# EAGLE board MainPSU (EAGLE 7.6.0)
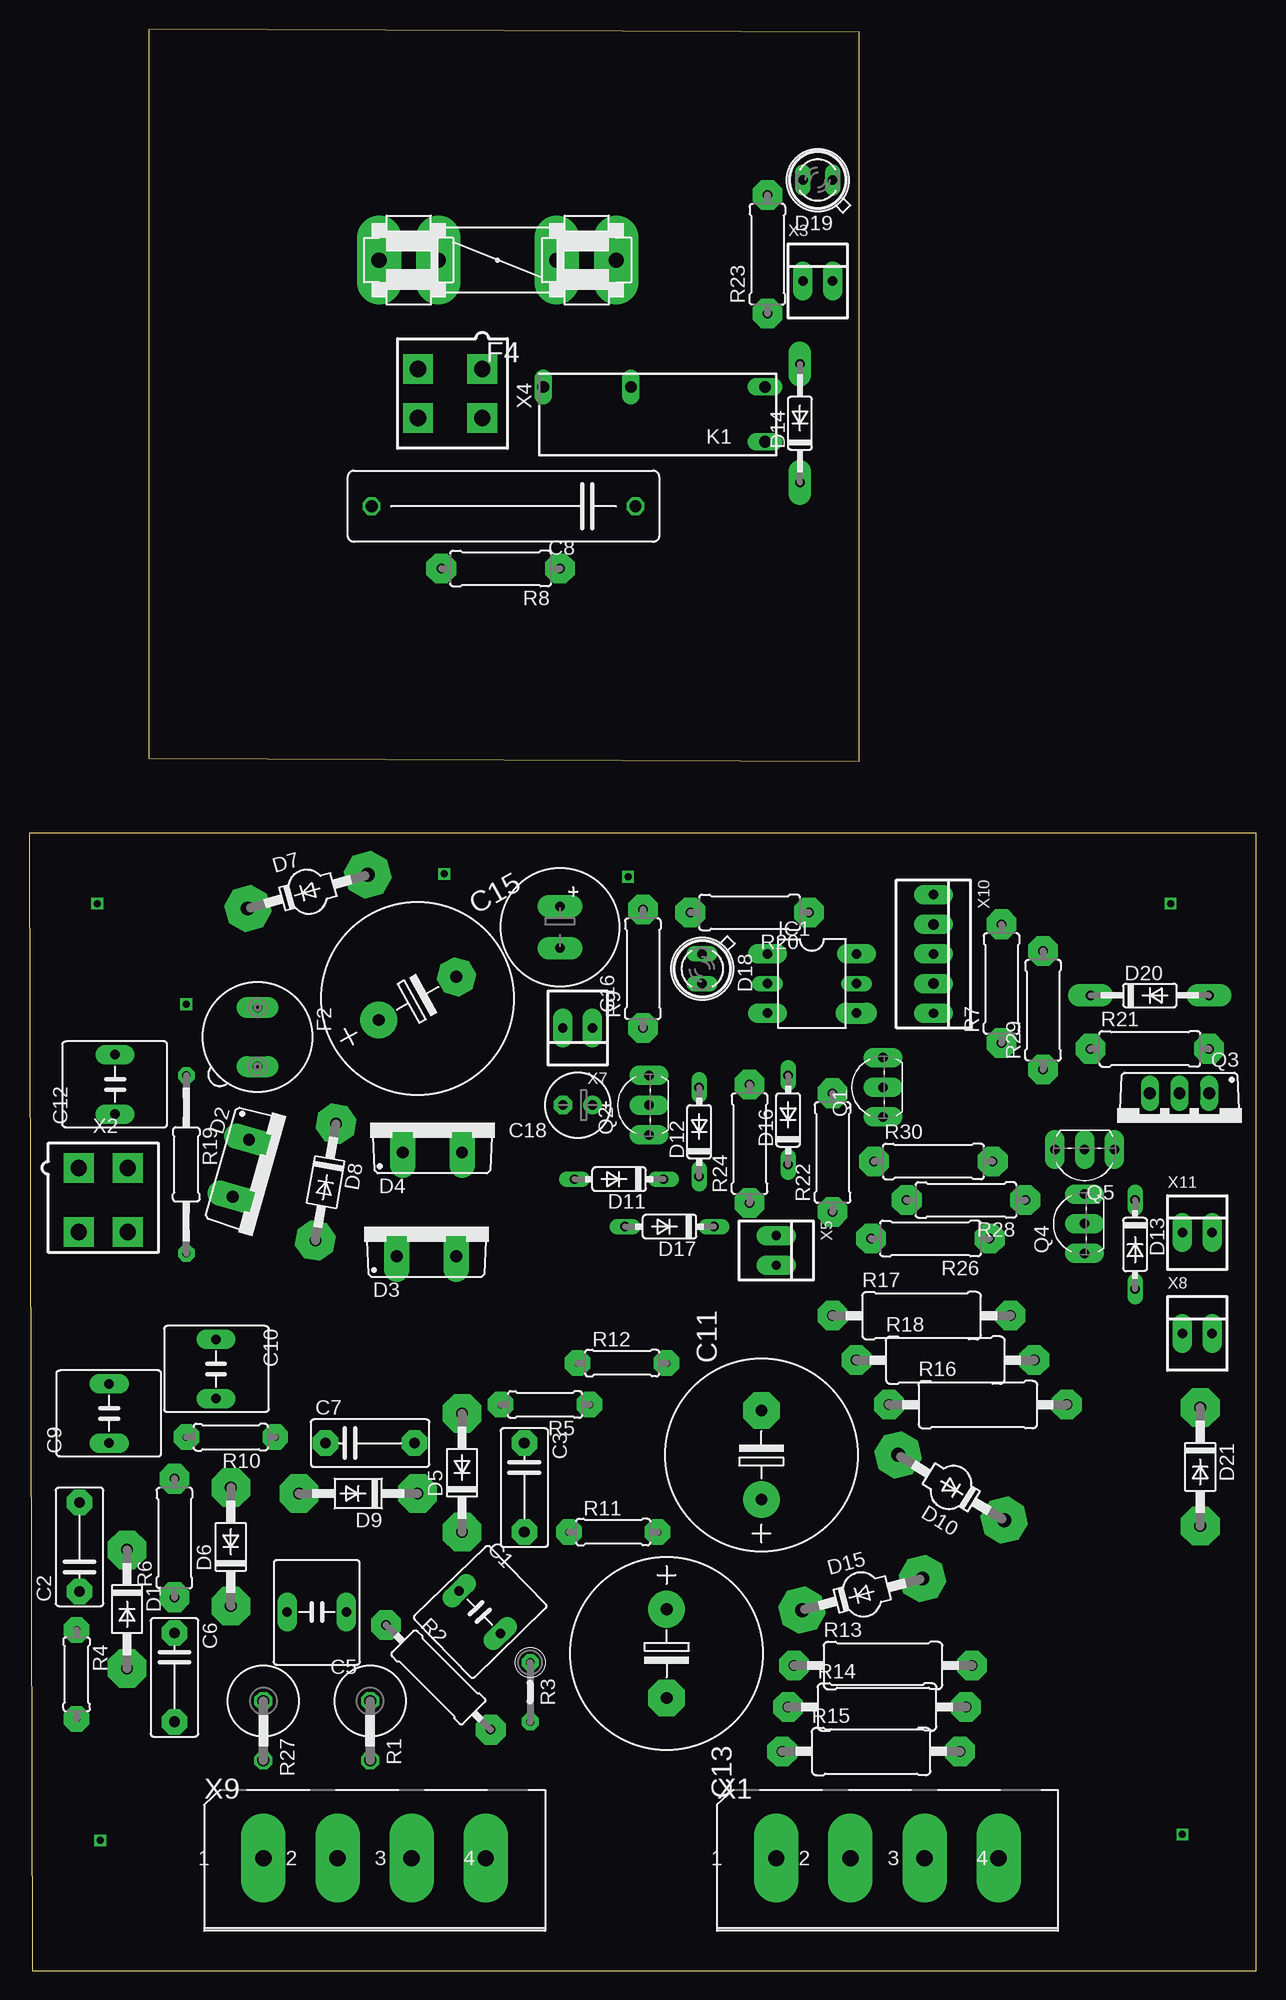
[diagram p0: board, top side]
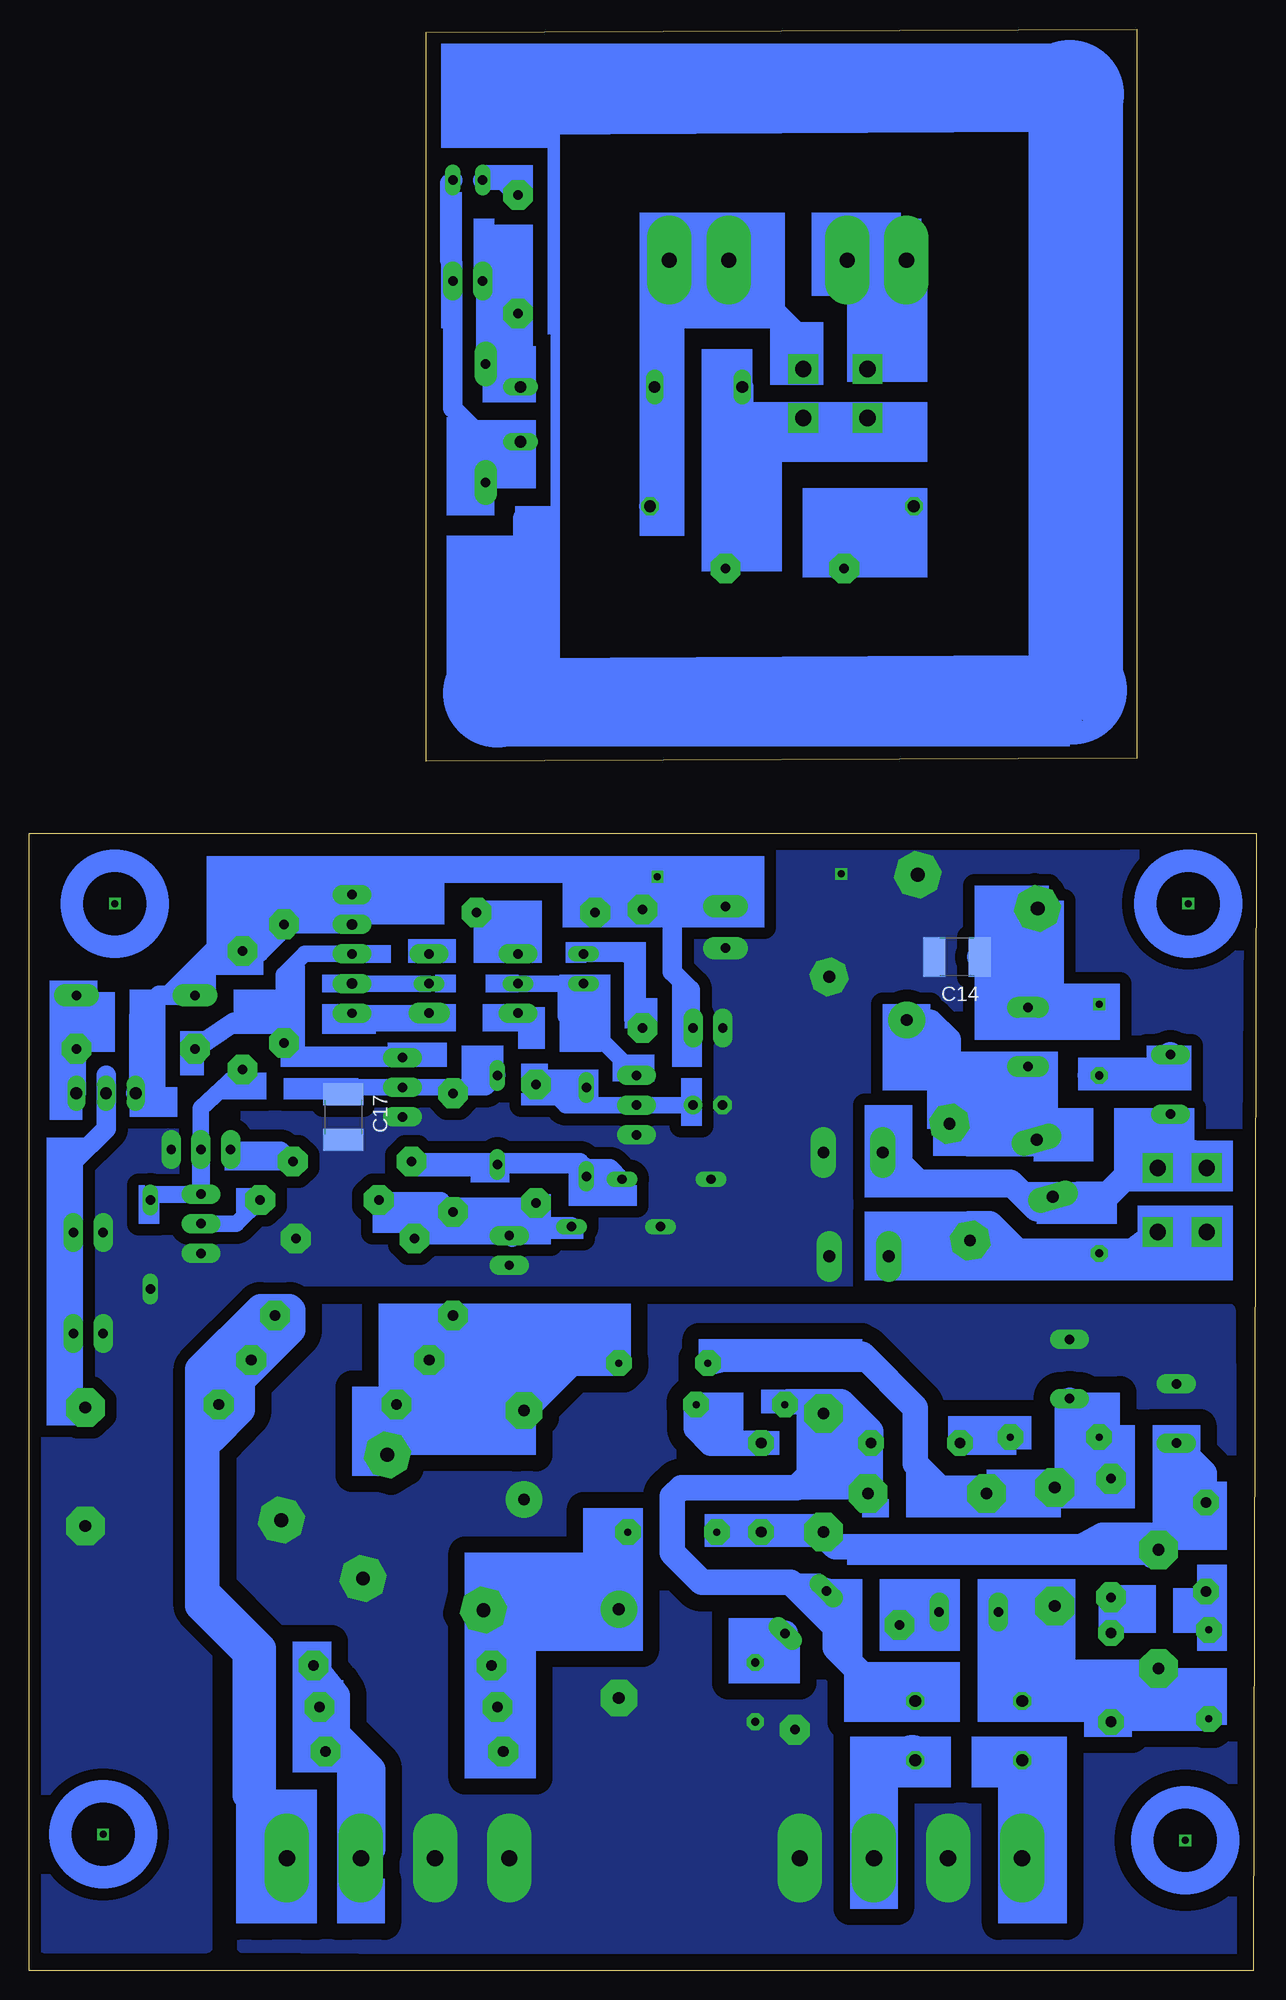
[diagram p1: board, bottom side, seen from below]

Size 105.14 x 166.35 mm. Coordinates in mm from the lower left corner, seen from the top.
Outline: 0.25,0 105.14,0 105.14,97.46 0,97.46 0.25,0
Outline: 10.24,166.35 10.24,103.89 71.12,103.63 71.12,166.1 10.24,166.35
Copper layers (1*16): Top 0.035mm / dielectric 1.5mm / Bottom 0.035mm
Design rules "default": minimum track width 10mil, minimum drill 24mil, track to track 8mil, track to pad 8mil, pad to pad 8mil, via to via 8mil, smd to smd 8mil, copper to edge 40mil, drill to drill 8mil, minimum pad ring 10mil, minimum via ring 8mil, stop-mask expansion 4mil, vias tented up to drill 0mil, thermal gap 10mil

## Footprints (pad centres in the part's own frame; a part is rotated, then mirrored left to right if it is on the bottom)
C050-075X075 = drill 0.813 pad 1.676 long: 1 -2.54,0; 2 2.54,0
C075-042X103 = drill 0.914 pad 2.184 octagon: 1 -3.81,0; 2 3.81,0
C225-062X268 = drill 1.016 octagon: 1 -11.303,0; 2 11.303,0
E7,5-16 = drill 1.016 pad 3.15: + -3.81,0 | drill 1.016 pad 3.15 octagon: - 3.81,0
C1812 = smd 1.9 x 3.4: 1 -1.95,0; 2 1.95,0
E3,5-10 = drill 0.813 pad 1.93 long: + -1.778,0; - 1.778,0
E2,5-6E = drill 0.813 pad 1.575: + -1.27,0 | drill 0.813 pad 1.575 octagon: - 1.27,0
DO41-10 = drill 1 pad 3.302 octagon: A 5.08,0; C -5.08,0
DO220S = drill 1.016 pad 2.184 long: A 2.54,-2.54; C -2.54,-2.54
SOD57-10 = drill 1.194 pad 3.81 octagon: A 5.334,0; C -5.334,0
DO35-7 = drill 0.813 long: A 3.81,0; C -3.81,0
DO35-10 = drill 0.813 pad 1.93 long: A 5.08,0; C -5.08,0
SFH482 = drill 0.813 long: A -1.27,0; K 1.27,0
19560 = drill 0.813 pad 1.778 long: 1 -2.54,0; 2 2.54,0
FUSE1 = drill 1.3 pad 3.81 long: 1A -10.16,0; 1B -5.08,0; 2A 10.16,0; 2B 5.08,0
DIL06 = drill 0.813 pad 1.676 long: 1 -2.54,-3.81; 3 2.54,-3.81; 6 -2.54,3.81 | drill 0.813 long: 2 0,-3.81; 5 0,3.81 | drill 0.813 pad 1.778 long: 4 2.54,3.81
LD = drill 1 long: 1 -9.2,2.35; 2 -9.2,-2.35; COM 2.3,-2.35; NO 9.8,-2.35
TO92-EBC = drill 0.813 pad 1.676 long: B 0,-1.27; C -2.54,-1.27; E 2.54,-1.27
TO220BV = drill 1.016 long: D 0,-2.54; G -2.54,-2.54; S 2.54,-2.54
0617V = drill 1.016 octagon: 1 -2.54,0; 2 2.54,0
0309/12 = drill 0.813 pad 2.54 octagon: 1 -6.35,0; 2 6.35,0
0207/5V = drill 0.7 pad 1.422 octagon: 1 -2.54,0; 2 2.54,0
0207/7 = drill 0.6 pad 2.184 octagon: 1 -3.81,0; 2 3.81,0
0309/10 = drill 0.813 pad 2.54 octagon: 1 -5.08,0; 2 5.08,0
0411/15 = drill 0.914 pad 2.54 octagon: 1 -7.62,0; 2 7.62,0
0207/15 = drill 0.7 pad 1.422 octagon: 1 -7.62,0; 2 7.62,0
GMSTBA4 = drill 1.397 pad 3.81 long: 1 -8.89,5.08; 2 -2.54,5.08; 3 3.81,5.08; 4 10.16,5.08
5566-4 = drill 1.4 pad 2.54 square: 1 2.1,-2.75; 2 -2.1,-2.75; 3 2.1,2.75; 4 -2.1,2.75
22-23-2021 = drill 0.8 pad 1.676 long: 1 -1.27,0; 2 1.27,0
22-23-2051 = drill 0.8 pad 1.676 long: 1 -5.08,0; 3 0,0; 5 5.08,0 | drill 0.9 pad 1.676 long: 2 -2.54,0; 4 2.54,0

## Placement (x,y rotation side)
C1  47nF  [C050-075X075]  38.61,30.73 314.1 top
C2  1nF  [C075-042X103]  4.32,36.32 90 top
C3  1nF  [C075-042X103]  42.42,41.4 270 top
C5  47nF  [C050-075X075]  24.64,30.73 180 top
C6  1nF  [C075-042X103]  12.45,25.15 270 top
C7  1nF  [C075-042X103]  29.21,45.21 0 top
C8  47nF X2  [C225-062X268]  40.64,125.48 180 top
C9  33nF  [C050-075X075]  6.86,47.75 90 top
C10  33nF  [C050-075X075]  16,51.56 270 top
C11  1800uF  [E7,5-16]  62.74,44.2 90 top
C12  100nF  [C050-075X075]  7.37,75.95 90 top
C13  1800uF  [E7,5-16]  54.61,27.18 270 top
C14  .1  [C1812]  25.65,86.87 180 bottom
C15  3300uF  [E7,5-16]  33.27,83.31 29.1 top
C16  100uF  [E3,5-10]  45.47,89.41 270 top
C17  1uF  [C1812]  78.23,73.15 270 bottom
C18  10uF  [E2,5-6E]  46.99,74.17 180 top
D1  MUR120  [DO41-10]  8.38,30.99 270 top
D2  3A  [DO220S]  20.57,68.07 254.1 top
D3  3A  [DO220S]  34.04,63.75 0 top
D4  3A  [DO220S]  34.54,72.64 0 top
D5  MUR120  [DO41-10]  37.08,42.67 90 top
D6  MUR120  [DO41-10]  17.27,36.32 90 top
D7  TVS20V  [SOD57-10]  23.88,92.46 15.7 top
D8  3A  [DO41-10]  25.4,67.56 260 top
D9  MUR120  [DO41-10]  28.19,40.89 180 top
D10  TVS36V  [SOD57-10]  78.99,41.4 148.4 top
D11  9v1  [DO35-7]  50.55,67.82 180 top
D12  4148  [DO35-7]  57.4,71.88 90 top
D13  9v1  [DO35-7]  94.74,62.23 270 top
D14  4007  [DO35-10]  66.04,132.59 90 top
D15  TVS36V  [SOD57-10]  71.37,32.26 14.7 top
D16  4148  [DO35-7]  65.02,72.9 90 top
D17  9v1  [DO35-7]  54.86,63.75 180 top
D18  LED  [SFH482]  57.66,85.85 270 top
D19  LED  [SFH482]  67.56,153.42 180 top
D20  9v1  [DO35-10]  96.01,83.57 0 top
D21  4007  [DO41-10]  100.33,43.18 270 top
F2  1A  [19560]  19.56,80.01 270 top
F4  250mA  [FUSE1]  40.13,146.56 180 top
IC1  4N28  [DIL06]  67.06,84.58 270 top
K1  G5NB  [LD]  53.85,133.35 180 top
Q1  ZVN2106  [TO92-EBC]  71.88,75.69 90 top
Q2  ZVN2106  [TO92-EBC]  51.82,74.17 90 top
Q3  PMOS  [TO220BV]  98.55,72.64 180 top
Q4  ZVN2106  [TO92-EBC]  89.15,64.01 90 top
Q5  ZVN2106  [TO92-EBC]  90.42,69.09 180 top
R1  2.2  [0617V]  29.21,20.57 270 top
R2  100  [0309/12]  35.05,25.15 315 top
R3  100  [0207/5V]  42.93,23.88 270 top
R4  1k  [0207/7]  4.06,25.4 270 top
R5  1k  [0207/7]  44.2,48.51 180 top
R6  1k  [0309/10]  12.45,37.08 90 top
R7  2k2  [0309/10]  83.31,84.58 90 top
R8  5.1  [0309/10]  40.39,120.14 180 top
R9  1k74  [0309/10]  52.58,85.85 90 top
R10  1k  [0207/7]  17.27,45.72 180 top
R11  .5A PTC  [0207/7]  50.04,37.59 0 top
R12  .5A PTC  [0207/7]  50.8,52.07 0 top
R13  68  [0411/15]  73.15,26.16 0 top
R14  68  [0411/15]  72.64,22.61 0 top
R15  68  [0411/15]  72.14,18.8 0 top
R16  68  [0411/15]  81.28,48.51 0 top
R17  68  [0411/15]  76.45,56.13 0 top
R18  68  [0411/15]  78.49,52.32 0 top
R19  220  [0207/15]  13.46,69.09 270 top
R20  330  [0309/10]  61.72,90.68 180 top
R21  4k7  [0309/10]  96.01,78.99 0 top
R22  1M  [0309/10]  68.83,70.1 90 top
R23  2k2  [0309/10]  63.25,147.07 90 top
R24  1M  [0309/10]  61.72,70.87 90 top
R26  4k7  [0309/10]  77.22,62.74 180 top
R27  2.2  [0617V]  20.07,20.57 270 top
R28  1k  [0309/10]  80.26,66.04 180 top
R29  4k7  [0309/10]  86.87,82.3 90 top
R30  220  [0309/10]  77.47,69.34 0 top
X1  DC  [GMSTBA4]  72.9,4.57 0 top
X2  9VAC  [5566-4]  6.35,66.04 180 top
X3  RELAY  [22-23-2021]  67.56,144.78 0 top
X4  LINE  [5566-4]  36.07,135.13 90 top
X5  PG  [22-23-2021]  64.01,61.72 270 top
X7  5V  [22-23-2021]  46.99,80.77 180 top
X8  5V-AUX  [22-23-2021]  100.08,54.61 0 top
X9  AC  [GMSTBA4]  28.96,4.57 0 top
X10  [22-23-2051]  77.47,87.12 270 top
X11  5V-AUX  [22-23-2021]  100.08,63.25 0 top

## Library data of the parts
C1-C3 C5-C18 R1-R24 R26-R30 = resistor
D1-D17 D20 D21 = diode
D18 D19 = led
F2 = fuse; MPN: 56000001009; OC_FARNELL: 1185363; OC_NEWARK: 15P8392
F4 = special
IC1 = ic-package
K1 = relay; OC_FARNELL: unknown; OC_NEWARK: unknown
Q1 Q2 Q4 Q5 = transistor-npn
Q3 = transistor-power
X1 X9 = con-phoenix-762; MF: FARNELL; MPN: 1757268; OC_FARNELL: 3705195; OC_NEWARK: 71C4163
X2 X4 = con-molex; OC_FARNELL: unknown; OC_NEWARK: unknown
X3 X5 X7 X8 X11 = con-molex; MF: MOLEX; MPN: 22-23-2021; OC_FARNELL: 1462926; OC_NEWARK: 25C3832
X10 = con-molex; MF: MOLEX; MPN: 22-23-2051; OC_FARNELL: 1462952; OC_NEWARK: 38C9178

## Nets
DGND: C9.2 C10.1 C11.+ C13.- D10.C D15.A R2.2 R3.2 X1.1 X1.2 X9.2 X9.4
GND: C14.2 C15.- C16.- C17.2 C18.- D3.A D4.A D7.A D11.A D13.A D17.A D21.A Q1.C Q2.C Q4.C Q5.C R26.1 X5.2 X7.2 X8.1 X11.1
N$2: R13.2 R14.2 R15.2 X1.3
N$3: R16.2 R17.2 R18.2 X1.4
N$5: R1.2 X9.3
N$6: R27.2 X9.1
N$8: C8.2 R8.2
N$9: C5.1 R2.1
N$11: C1.2 R3.1
N$12: C13.+ D15.C R11.2 R13.1 R14.1 R15.1
N$13: C8.1 F4.1A K1.COM X4.1
N$14: C12.2 R19.1
N$15: D21.C Q3.D X8.2 X11.2
N$16: C1.1 C7.2 D5.A D9.C R1.1 R5.2
N$17: F4.2A X4.3
N$18: C2.1 R4.1
N$19: C2.2 C3.2 C9.1 D1.C D5.C R11.1
N$20: C5.2 C6.2 D1.A D6.C R4.2 R27.1
N$21: K1.NO R8.1 X4.2 X4.4
N$22: C3.1 R5.1
N$24: C11.- D10.A R12.2 R16.1 R17.1 R18.1
N$26: C6.1 R6.1
N$28: D3.C D8.A R19.2 X2.3 X2.4
N$29: C10.2 D6.A D9.A R6.2 R10.2 R12.1
N$30: C7.1 R10.1
N$33: C16.+ D20.C Q3.S R7.2 R9.2 R20.2 R29.2 X7.1 X10.1 X10.2
N$34: D18.K IC1.2 Q2.E
N$35: C12.1 D2.A D4.C X2.1 X2.2
N$36: D14.A K1.2 R23.1 X3.1
N$37: D20.A Q3.G R21.2
N$38: C18.+ D12.A Q2.B R24.2
N$39: C17.1 D16.A Q1.B R22.2
N$40: D17.C R22.1 R24.1 R26.2 R28.2 X5.1
N$41: Q4.B R28.1
N$42: D13.C Q4.E Q5.B R29.1
N$43: Q5.E R30.2
N$44: D11.C D12.C D16.C R30.1
N$45: D19.K R23.2
N$46: IC1.1 R20.1
N$48: C15.+ D2.C D8.C F2.2
N$49: C14.1 D7.C F2.1
N$51: D14.C D19.A K1.1 X3.2
N$52: IC1.4 X10.5
N$53: Q1.E R7.1 R21.1 X10.3
N$54: D18.A R9.1
N$55: IC1.5 X10.4

## Tracks (layer width: path | path; a pad name or v marks a point on that pad's centre or on a via)
DGND
  pour Bottom (isolate 1.422, no thermals): 86.87,2.03 87.63,56.64 2.29,56.64 2.03,1.27
GND  (via drill 0.6)
  other vias: 35.56,93.98
  pour Bottom (isolate 1.016, no thermals): 89.92,2.03 89.92,55.63 86.36,59.18 1.78,59.18 1.52,95.76 13.72,95.5 103.38,95.5 103.89,2.03
N$1  (via drill 0.6)
  other vias: 5.84,91.44
N$2
  Bottom 2.184: R13.2 78.74,23.62 | 78.74,23.62 78.74,19.05 79.5,19.05 R15.2 | 76.71,8.64 76.45,8.89 X1.3 75.69,10.41 75.69,17.27 80.26,21.84 R14.2 79.25,23.62 78.74,23.62
N$3
  Bottom 2.184: R17.2 86.99,53.21 | 86.99,53.21 89.92,50.29 89.92,49.53 | 83.06,12.7 83.82,13.46 83.82,13.72 85.09,14.99 | R16.2 89.92,49.53 | R18.2 86.99,53.21 | 85.85,28.45 86.11,28.19 | 89.92,49.53 89.92,32.51 85.09,27.69 85.09,14.99 | 90.68,45.97 90.68,45.47 89.41,45.47 86.87,48.01 86.87,50.55 82.55,54.86 82.55,56.64 82.8,56.9 85.34,56.9 90.68,51.56 90.68,31.24 87.12,27.69 | 86.11,28.19 85.85,27.94 85.85,15.75 85.09,14.99 | 86.11,28.19 86.36,27.94 | 86.36,27.94 87.38,27.94 | 87.12,27.69 86.61,27.18 86.61,14.99 83.06,11.43 83.06,8.89 82.8,9.14 X1.4 82.8,10.41 | 86.36,27.94 86.61,27.69 87.12,27.69
N$4  (via drill 0.6)
  other vias: 6.1,11.18
N$5
  Bottom 3.81: R1.2 29.46,18.29 32.51,17.78 32.77,18.03 X9.3
N$6
  Bottom 3.81: R27.2 X9.1 20.07,8.64
N$7
  Bottom 1.93: 62.74,124.46 62.74,111.51 18.54,111.76 18.54,158.5 62.74,158.24 62.48,158.5
N$8
  Bottom 1.93: C8.2 34.29,125.48 35.31,124.46 R8.2
N$9
  Bottom 2.184: R2.1 29.97,30.73 C5.1
N$10  (via drill 0.6)
  other vias: 97.79,91.44
N$11
  Bottom 2.184: R3.1 40.43,28.91 C1.2
N$12
  Bottom 2.184: R11.2 53.85,31.24 C13.+ 62.47,31.18 | D15.C 65.02,31.24 62.47,31.18 | R15.1 65.02,19.3 | 65.02,19.3 R14.1 | R14.1 66.04,23.62 R13.1 62.47,29.73 62.47,31.18 | 65.02,19.3 65.28,19.56 65.28,22.1 64.77,22.61 R14.1
N$13
  Bottom 1.93: X4.1 38.82,139.66 43.94,144.78 48.51,144.78 49.91,146.18 | 49.91,146.18 F4.1A | 49.91,146.18 51.55,144.54 K1.COM 51.55,125.59 C8.1
N$14
  Bottom 2.184: C12.2 8.13,77.22 8.64,76.71 R19.1 14.22,76.71
N$15
  Bottom 1.676: 98.55,76.71 Q3.D 98.55,72.14 101.35,69.34 X11.2 X8.2 101.35,49.02 D21.C
N$16
  Bottom 2.184: R1.1 30.48,24.38 32.77,24.38 36.07,27.69 36.07,29.46 37.97,31.37 | 37.97,31.37 39.88,33.27 47.5,33.27 50.04,35.81 50.04,40.64 49.28,41.4 39.37,41.4 37.85,42.93 37.08,42.93 | 37.08,43.69 D5.A 37.34,47.75 38.35,48.77 | 37.08,43.69 37.08,42.93 | R5.2 40.13,48.77 39.12,48.77 38.35,48.77 | D9.C 35.31,42.93 37.08,42.93 | 34.54,43.69 37.08,43.69 | C1.1 37.97,31.42 37.97,31.37 | C7.2 33.02,46.23 35.56,48.77 38.35,48.77
N$17
  Bottom 1.93: X4.3 32.51,138.03 32.51,146.81 32.26,146.56 F4.2A
N$18
  Bottom 2.184: R4.1 4.06,32.51 C2.1
N$19
  Bottom 1.93: C9.1 4.32,42.67 C2.2
  Bottom 2.184: C2.2 8.13,37.34 8.89,37.34 | 8.89,37.34 13.21,37.34 14.99,36.32 36.07,36.32 37.34,37.59 | 37.34,37.59 C3.2 R11.1 | D5.C 37.34,37.59 | D1.C 8.89,35.56 8.89,37.34
N$20
  Bottom 2.184: R4.2 4.83,23.11 8.38,23.11 | 8.38,23.11 12.7,23.11 | 12.7,23.11 17.27,23.11 | 17.27,23.11 R27.1 | D1.A 8.38,23.11 | C6.2 12.7,21.59 12.7,23.11 | D6.C 17.27,23.11 | C5.2 22.1,28.45 17.27,23.11
N$21
  Bottom 1.93: 42.67,133.03 X4.2 X4.4 | 42.67,133.03 43.62,133.03 44.05,133.46 K1.NO | R8.1 42.67,122.94 42.67,133.03
N$22
  Bottom 2.184: C3.1 46.74,45.21 48.01,46.48 R5.1
N$24
  Bottom 2.184: C11.- 58.67,52.07 | 58.67,52.07 R12.2 | 58.67,52.07 58.93,52.32 67.82,52.32 68.71,51.43 | 68.71,51.43 68.96,51.18 | 68.96,51.18 74.52,45.62 D10.A 74.71,47.46 R16.1 | R17.1 68.71,56.01 68.71,51.43 | R18.1 69.72,51.18 68.96,51.18
N$25  (via drill 0.6)
  other vias: 98.81,11.68
N$26
  Bottom 2.184: C6.1 R6.1
N$28
  Bottom 1.676: X2.3 X2.4
  Bottom 2.184: D8.A 25.08,61.21 30.73,61.21 32.26,62.74 32.26,63.5 32,63.25 D3.C | X2.4 11.54,60.96 12.95,60.96 | 12.95,60.96 21.08,60.96 20.83,61.21 20.07,61.21 22.86,64.01 24.64,64.01 23.62,62.99 D8.A | 23.11,62.99 D8.A | R19.2 12.95,60.96
N$29
  Bottom 1.93: C10.2 13.72,45.72 R10.2
  Bottom 2.184: R10.2 12.45,44.7 R6.2 12.7,42.42 D6.A 19.3,41.15 19.81,41.4 21.08,41.4 21.59,40.89 D9.A 26.67,40.89 29.21,43.43 29.21,48.26 33.78,52.83 43.94,52.83 R12.1
N$30
  Bottom 2.184: R10.1 21.34,45.97 24.64,45.97 C7.1
N$32  (via drill 0.6)
  other vias: 13.46,82.8
N$33
  Bottom 1.422: 83.57,90.93 83.31,90.93 | 83.31,90.93 83.06,90.93 | R7.2 83.31,90.93 | 83.06,90.93 77.47,90.93 X10.1 | R9.2 52.32,91.19 50.04,91.19 C16.+ | 83.57,90.93 83.57,88.9 85.34,87.12 87.12,87.12 87.12,88.65 84.84,90.93 83.57,90.93 | 83.06,90.93 84.71,89.28 85.85,88.14 86.36,88.14 R29.2
  Bottom 1.676: X7.1 48.51,81.03 48.51,84.07 50.04,85.6 50.04,91.19 | D20.C 93.22,83.57 | 93.22,83.57 87.5,89.28 84.71,89.28 | Q3.S 95.76,75.44 95.76,81.79 93.98,83.57 93.22,83.57 | X10.2 77.47,90.93 74.17,94.23 55.37,94.23 55.12,93.98 52.58,93.98 | R9.2 52.58,93.98 | 52.58,93.98 55.88,90.68 R20.2
N$34
  Bottom 1.422: Q2.E 56.13,79.76 57.15,79.76 59.18,81.79 59.18,84.58 D18.K IC1.2
N$35
  Bottom 0.406: C12.1 8.13,71.88 7.87,71.88
  Bottom 1.676: 7.87,69.34 8.38,69.85 8.38,70.1
  Bottom 2.184: D4.C 32.26,70.87 28.96,67.56 21.08,67.56 18.8,65.28 D2.A 15.24,66.55 12.7,66.55 9.14,70.1 8.38,70.1 5.33,70.1 5.01,69.53 X2.1 | 7.87,72.9 7.87,71.88 7.87,69.34 8.43,68.79 X2.2
N$36
  Bottom 1.676: K1.2 64.07,135.7 D14.A 66.04,139.19 | X3.1 66.04,144.53 66.04,139.19 | R23.1 66.04,139.19
N$37
  Bottom 1.676: D20.A 100.08,83.57 100.08,80.26 R21.2 Q3.G
N$38
  Bottom 1.422: 60.07,75.06 59.18,74.17 Q2.B C18.+ | 60.07,75.06 60.96,75.95 R24.2 | D12.A 57.66,75.44 59.69,75.44 60.07,75.06
N$39
  Bottom 1.422: D16.A 66.04,75.69 68.58,75.69 | 68.58,75.69 Q1.B 77.64,75.69 C17.1 | R22.2 68.58,75.44 68.58,75.69
N$40
  Bottom 1.422: R22.1 69.22,65.41 | 69.22,65.41 69.85,66.04 72.14,66.04 | 72.14,66.04 R28.2 | R26.2 72.14,66.04 | R24.1 61.98,65.53 63.75,65.53 | 63.75,65.53 68.58,65.53 68.71,65.41 69.22,65.41 | X5.1 63.75,62.74 63.75,64.52 63.75,65.53
  Bottom 1.676: D17.C 62.23,63.75 62.99,64.52 63.75,64.52
N$41
  Bottom 1.422: R28.1 87.38,64.01 Q4.B
N$42
  Bottom 1.422: D13.C 94.49,66.55 Q4.E Q5.B 90.42,73.91 R29.1
N$43
  Bottom 1.422: R30.2 83.57,70.36 Q5.E
N$44
  Bottom 1.422: D11.C 55.37,68.83 57.4,68.83 57.66,69.09 | 57.66,69.09 57.91,69.34 65.02,69.34 | 65.02,69.34 R30.1 | D16.C 65.02,69.34 | D12.C 57.66,68.33 57.66,69.09
N$45
  Bottom 1.676: R23.2 64.52,153.42 D19.K
N$46
  Bottom 1.676: R20.1 IC1.1
N$48
  Bottom 2.184: 16.26,70.87 24.7,70.87 D8.C 26.67,72.83 | 16.26,70.87 15.49,70.87 16,71.37 | 16.26,70.87 D2.C | C15.+ 27.94,81.28 26.42,79.76 26.42,75.44 22.35,71.37 D2.C | D2.C 16,71.37 | 16,71.37 15.24,71.37 | F2.2 19.3,77.22 19.3,72.14 | 19.3,72.14 19.3,71.88 | D2.C 18.54,72.14 19.3,72.14
N$49
  Bottom 2.184: F2.1 18.97,83.13 D7.C 21.95,86.87 C14.1
N$51
  Bottom 1.676: D14.C 63.05,130.5 K1.1 63.05,130.1 62.99,130.05 65.02,130.05 68.83,133.86 X3.2 68.83,146.3 69.09,146.56 69.09,153.16 D19.A
N$52
  Bottom 1.422: IC1.4 X10.5
N$53
  Bottom 1.422: Q1.E 73.41,78.49 82.55,78.49 83.31,79.25 R7.1 83.31,81.28 83.31,85.34 81.53,87.12 X10.3
  Bottom 1.676: R21.1 87.63,81.28 83.31,81.28
N$54
  Bottom 1.422: D18.A 53.85,87.12
  Bottom 1.676: R9.1 53.34,81.53 53.34,86.87 53.59,87.12 53.85,87.12
N$55
  Bottom 1.422: IC1.5 X10.4
N$56  (via drill 0.6)
  other vias: 51.31,93.73
(copper drawn outside any net)
  shapes: Bottom area x387, Bottom circle x7